# Altium PCB TSI_SAMP_SAMI_V3.4.PcbDoc (part 3 of 5)
Units mm, origin at the board's own origin, x right, y up, seen from the top; angles counter-clockwise.
Board outline 189 x 127.41 mm, 4 copper layers (Top Layer, GROUND, POWER, Bottom Layer), stack 1.56 mm thick; 227 components, 161 nets, 868 pads, 584 vias.
Unrouted connection lines stored in the file: 18.
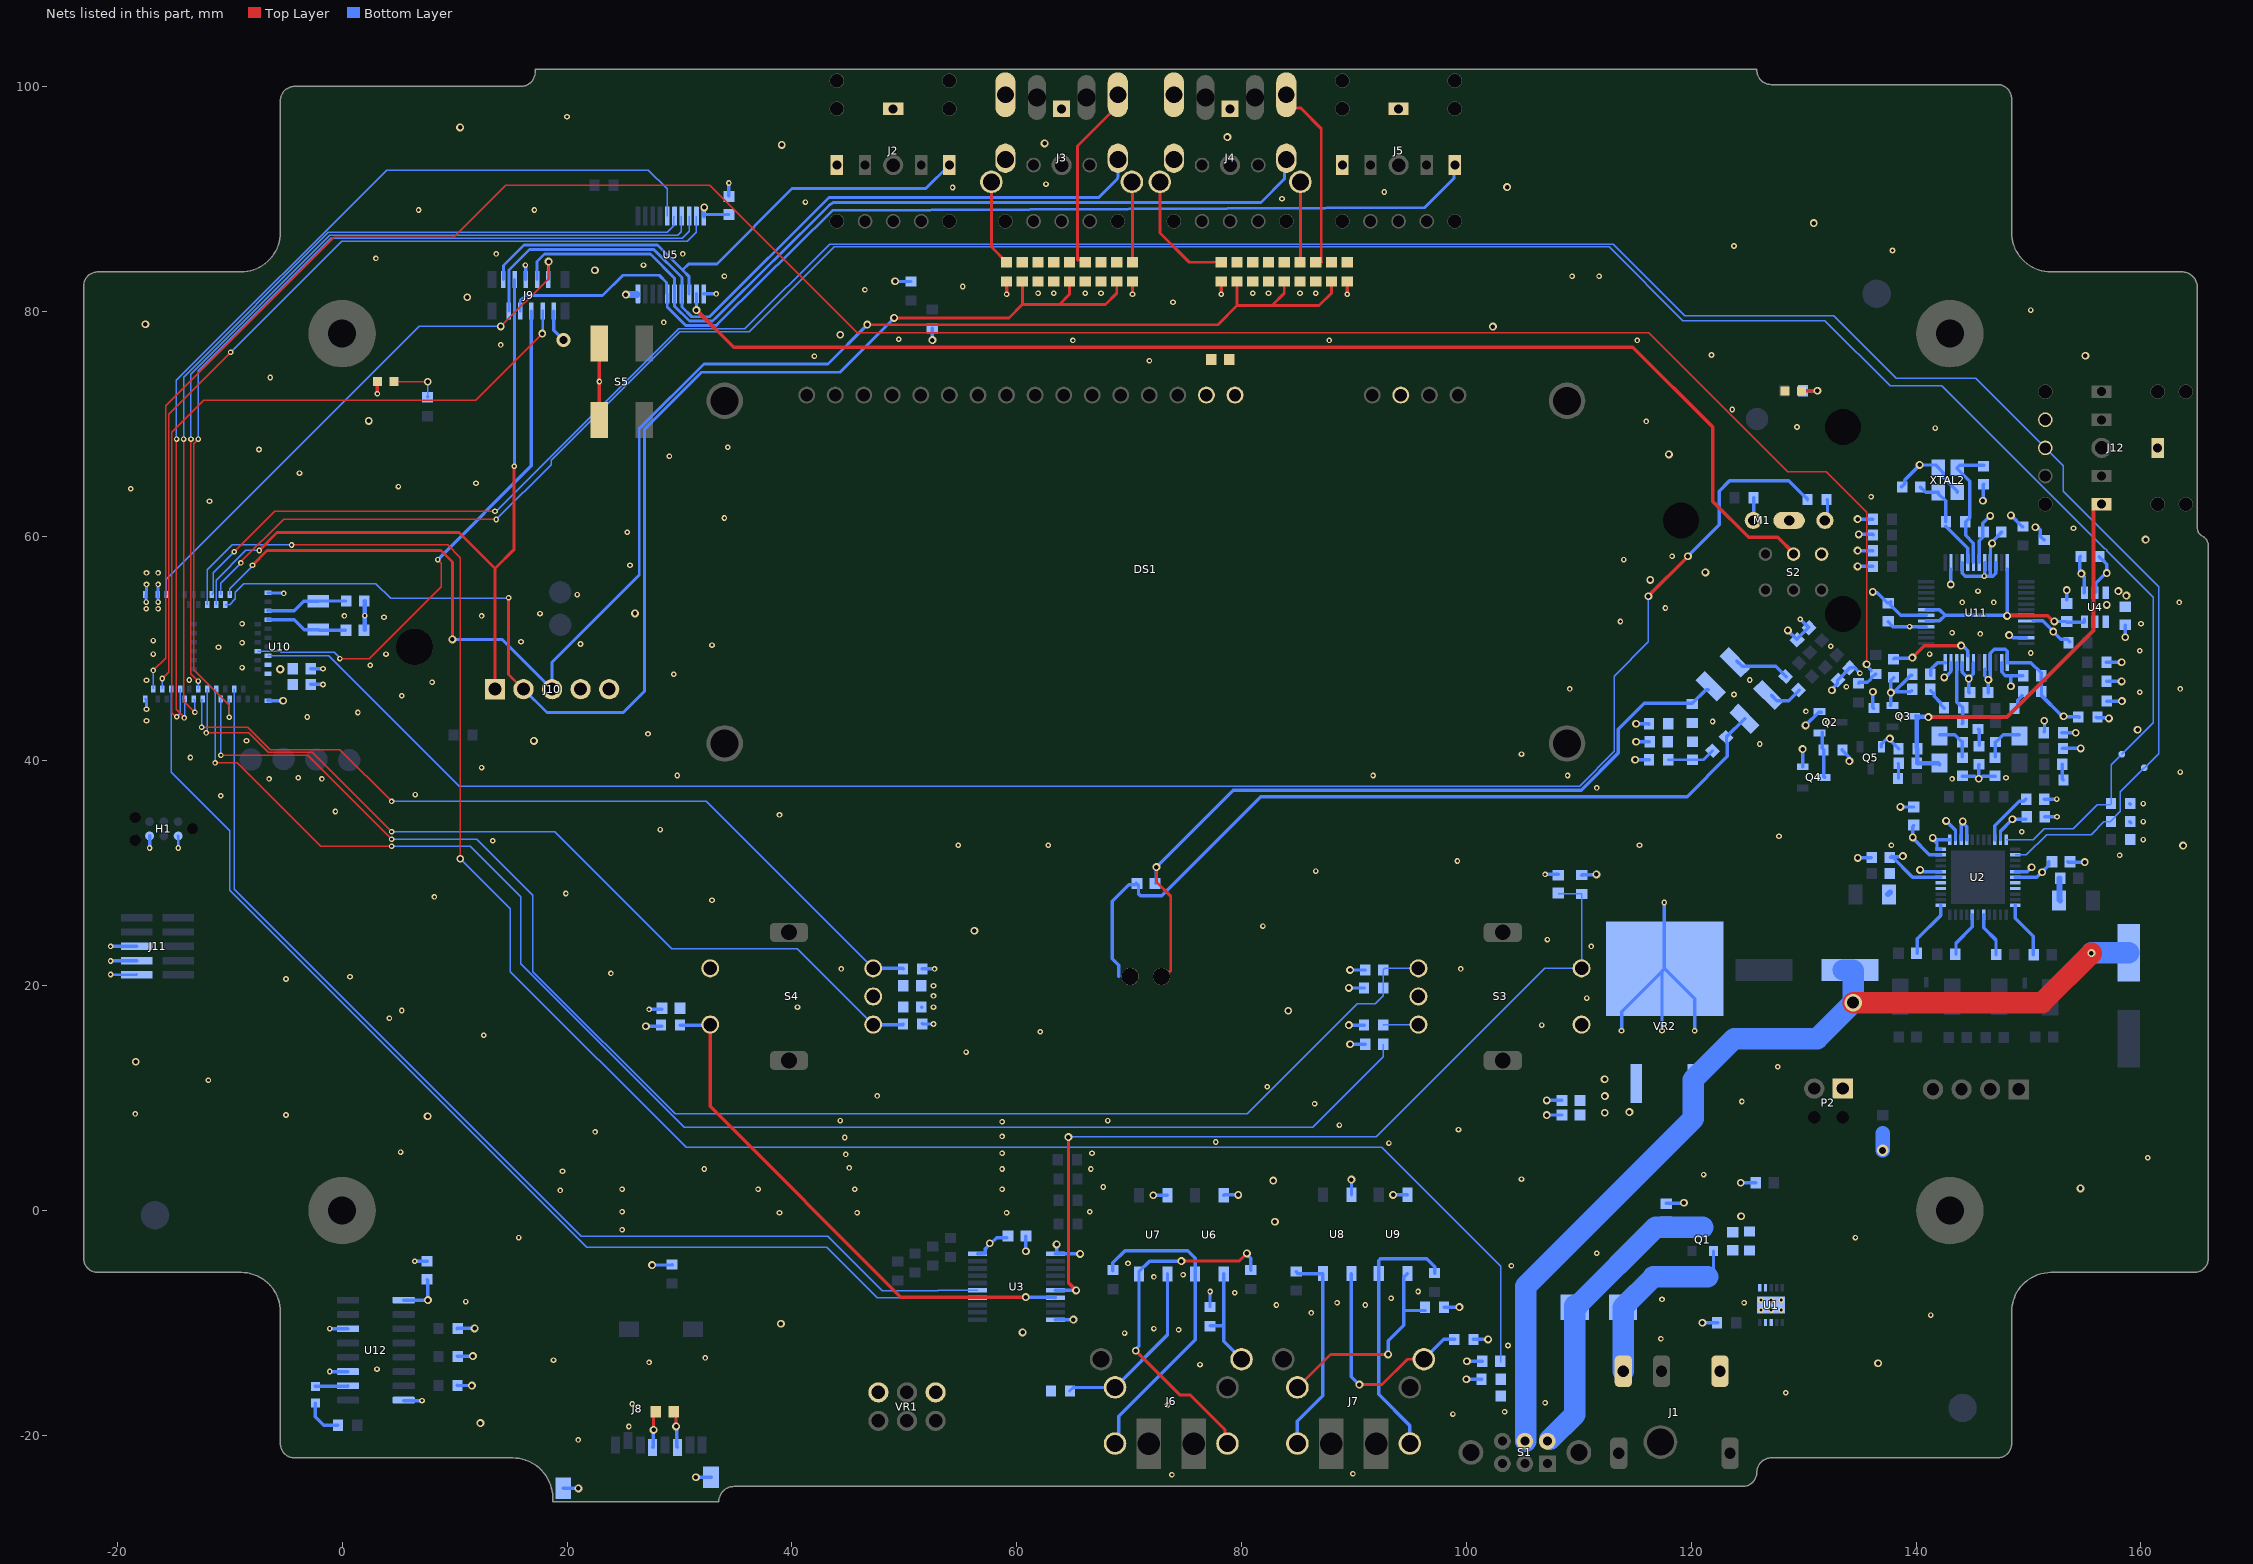
[diagram p4: the nets of this part, all layers, seen from the top]

## Part data (continued)
R8 R11 R26 R28 R30 R32 R34 R36 R37 R43 R48 R49 R50 R59 R60 R61 R64 R66: library part RES_10K_0603, "Res Thick Film 0603 10K Ohm 5% 1/10W 200ppm/C Molded SMD SMD Paper T/R", Case Code (Imperial)=0603, Case Code (Metric)=1608, Manufacturer="Vishay Dale", Manufacturer Part Number=CRCW060310K0JNEA, Max Operating Temperature=155°C, Max Power Dissipation=100mW, Min Operating Temperature=-55°C, Package Quantity=1, Resistance=10kR, Resistance Tolerance=5%, Resistor Type="Thick Film", Supplier Part Number 1=RMCF0603FT10K0CT-ND, Temperature Coefficient=200ppm/°C, Voltage Rating=75V, Case/Package=0603, Category="Chip SMD Resistors", ComponentLink1Description=https://datasheet.ciiva.com/3256/dcrcwe3-3256943.pdf?src-supplier=Avnet, ComponentLink1URL=https://datasheet.ciiva.com/3256/dcrcwe3-3256943.pdf?src-supplier=Avnet, ComponentLink2Description=https://datasheet.ciiva.com/2461/dcrcwe3-2461971.pdf?src-supplier=Digi-Key, ComponentLink2URL=https://datasheet.ciiva.com/2461/dcrcwe3-2461971.pdf?src-supplier=Digi-Key, ComponentLink3Description=https://datasheet.ciiva.com/2461/dcrcwe3-2461972.pdf?src-supplier=Digi-Key, ComponentLink3URL=https://datasheet.ciiva.com/2461/dcrcwe3-2461972.pdf?src-supplier=Digi-Key, ComponentLink4Description=https://datasheet.ciiva.com/2461/dcrcwe3-2461973.pdf?src-supplier=Digi-Key, ComponentLink4URL=https://datasheet.ciiva.com/2461/dcrcwe3-2461973.pdf?src-supplier=Digi-Key, ComponentLink5Description=https://datasheet.ciiva.com/3256/dcrcwe3-3256942.pdf?src-supplier=Avnet, ComponentLink5URL=https://datasheet.ciiva.com/3256/dcrcwe3-3256942.pdf?src-supplier=Avnet, ComponentLink6Description=https://datasheet.ciiva.com/16343/dcrcwe3-16343525.pdf?src-supplier=Future+Electronics, ComponentLink6URL=https://datasheet.ciiva.com/16343/dcrcwe3-16343525.pdf?src-supplier=Future+Electronics, ComponentLink7Description=https://datasheet.ciiva.com/16755/70201119-16755717.pdf?src-supplier=Allied+Electronics, ComponentLink7URL=https://datasheet.ciiva.com/16755/70201119-16755717.pdf?src-supplier=Allied+Electronics, ComponentLink8Description=https://datasheet.ciiva.com/16515/dcrcwe3-16515020.pdf?src-supplier=Avnet+Asia, ComponentLink8URL=https://datasheet.ciiva.com/16515/dcrcwe3-16515020.pdf?src-supplier=Avnet+Asia, ComponentLink9Description=https://datasheet.ciiva.com/16771/70201119-16771051.pdf?src-supplier=Allied+Electronics, ComponentLink9URL=https://datasheet.ciiva.com/16771/70201119-16771051.pdf?src-supplier=Allied+Electronics, Construction=Rectangular, Contact Plating=Tin, Depth=0.85mm, Features="Automotive AEC-Q200", Height=0.02inch, Lead Free="Lead Free", Length=1.55mm, Military Standard=Not, Mount="Surface Mount", Number of Pins=2, Number of Terminations=2, Packaging="Tape and Reel", Power Rating=100mW, Pricing 1="1=0.10000, 10=0.03200, 100=0.01310, 1000=0.00588, 2500=0.00510 (USD)", Radiation Hardening=No, REACH SVHC=Unknown, RoHS=Yes, RoHS Compliant=Yes, Series=CRCW, Size Code=0603, Stock 1=2, Supplier 1=Digi-Key, Termination=SMD/SMT, Tolerance=5%, Voltage Rating (DC)=75V, Weight=7.1E-05oz, Width=0.033inch
R12 R13: library part RES_22R_0603, "RES 22 OHM 1% 1/10W 0603", Supplier Part Number 1=A129668CT-ND, Supplier 1=Digi-Key
R14 R15 R44 R45 R46 R47 R58 R71 R73: library part RES_1K_0603, "1 kOhms ±1% 0.25W, 1/4W Chip Resistor 0603 (1608 Metric) Pulse Withstanding Thick Film", Supplier Part Number 1=541-3949-1-ND, Supplier 1=Digi-Key
R16 R17 R18 R19 R27 R29 R31 R33 R35 R65 R67 R68 R69 R70 R72 R74 R75 R76 R77 R78 R79 R80 R81 R82 R83 R84 R85 R86 R87 R88 R89 R90 R91 R92: library part RES_0R_0603, "RES SMD 0 OHM JUMPER 1/10W 0603", Supplier Part Number 1=A106051CT-ND, Supplier 1=Digi-Key
R20 R21: library part RES_4K7_0603, "RES 4.7K OHM 1% 1/4W 0603", Supplier Part Number 1=A130424CT-ND, Supplier 1=Digi-Key
R22 R23 R24 R25: library part RES_190R_0603, "RES 191 OHM 1% 1/10W 0603", Supplier Part Number 1=311-191HRCT-ND, Supplier 1=Digi-Key
R38: library part RES_1M_0603, "RES 1M OHM 1% 1/4W 0603", Supplier Part Number 1=A130452CT-ND, Supplier 1=Digi-Key
R51 R56: library part RES_100R_0603, "100 Ohms ±1% 0.25W, 1/4W Chip Resistor 0603 (1608 Metric) Pulse Withstanding Thick Film", Supplier Part Number 1=541-3244-1-ND, Supplier 1=Digi-Key
R57: library part RES_10R_0603, "10 Ohms ±1% 0.1W, 1/10W Chip Resistor 0603 (1608 Metric) Automotive AEC-Q200 Thick Film", Supplier Part Number 1=RMCF0603FT10R0CT-ND, Supplier 1=Digi-Key
R62 R63: library part "470 Resistor", "RES 470 OHM 1% 1/4W 0603", Manufacturer 1="TE Connectivity Passive Product", Manufacturer Part Number 1=CRGP0603F470R, Supplier Part Number 1=A130412CT-ND, Supplier 1=DigiKey
S1: library part SW_SLIDE_RA_TH_DPDT, "Slide Switch DPDT Through Hole, Right Angle", Supplier Part Number 1=612-EG2211, Supplier 1=Mouser
S2: library part SW_SLIDE_SPDT_VERT_TH, "SWITCH SLIDE SPDT 300MA 30V", Supplier Part Number 1=EG1919-ND, Supplier 1=Digi-Key
S3 S4: library part ENC_ROTARY_20PPR_TH, "Rotary Encoder Mechanical 20 Quadrature (Incremental) Vertical", Supplier Part Number 1=PEC11L-4115F-S0020-ND, Supplier 1=Digi-Key
S5: library part SW_TACTILE_SPST-NO, "Switch, SPNO SMD", Actuator Color=White, Case/Package=SMD/SMT, Contact Current Rating=20mA, Contact Resistance=100mR, Manufacturer=Panasonic, Manufacturer Part Number=EVQ-Q2U03W, Max Operating Temperature=85°C, Max Voltage Rating (AC)=250V, Max Voltage Rating (DC)=15V, Min Operating Temperature=-40°C, Operating Force=2.6N, Package Quantity=1, Supplier Part Number 1=P12955SCT-ND, Actuator Length=1.3mm, Actuator Type=Standard, Body Depth=6mm, Category="Tactile Switches", Color=White, ComponentLink1Description=https://datasheet.ciiva.com/25603/0900766b810ad3e5-25603904.pdf?src-supplier=RSComponents, ComponentLink1URL=https://datasheet.ciiva.com/25603/0900766b810ad3e5-25603904.pdf?src-supplier=RSComponents, ComponentLink2Description=https://datasheet.ciiva.com/8165/atk0000ce28-8165166.pdf?src-supplier=Avnet, ComponentLink2URL=https://datasheet.ciiva.com/8165/atk0000ce28-8165166.pdf?src-supplier=Avnet, ComponentLink3Description=https://datasheet.ciiva.com/2899/atk0000ce28-2899560.pdf?src-supplier=Digi-Key, ComponentLink3URL=https://datasheet.ciiva.com/2899/atk0000ce28-2899560.pdf?src-supplier=Digi-Key, ComponentLink4Description=https://datasheet.ciiva.com/2899/atk0000ce28-2899561.pdf?src-supplier=Digi-Key, ComponentLink4URL=https://datasheet.ciiva.com/2899/atk0000ce28-2899561.pdf?src-supplier=Digi-Key, ComponentLink5Description=https://datasheet.ciiva.com/2899/atk0000ce28-2899562.pdf?src-supplier=Digi-Key, ComponentLink5URL=https://datasheet.ciiva.com/2899/atk0000ce28-2899562.pdf?src-supplier=Digi-Key, ComponentLink6Description=https://datasheet.ciiva.com/30263/8atk0000ce28-30263950.pdf?src-supplier=Onlinecomponents.com, ComponentLink6URL=https://datasheet.ciiva.com/30263/8atk0000ce28-30263950.pdf?src-supplier=Onlinecomponents.com, ComponentLink7Description=https://datasheet.ciiva.com/17022/70270561-17022925.pdf?src-supplier=Allied+Electronics, ComponentLink7URL=https://datasheet.ciiva.com/17022/70270561-17022925.pdf?src-supplier=Allied+Electronics, ComponentLink8Description=https://datasheet.ciiva.com/16438/atk0000ce28-16438077.pdf?src-supplier=Future+Electronics, ComponentLink8URL=https://datasheet.ciiva.com/16438/atk0000ce28-16438077.pdf?src-supplier=Future+Electronics, ComponentLink9Description=https://datasheet.ciiva.com/46401/28111-46401279.pdf?src-supplier=Element14, ComponentLink9URL=https://datasheet.ciiva.com/46401/28111-46401279.pdf?src-supplier=Element14, Contact Plating=Gold,Silver, Current Rating=20mA, Depth=6.6mm, Electrical Life=200000Cycles, Height=2.5mm, Illumination Type=Non-Illuminated,Illuminated, Lead Free="Lead Free", Length=6.5mm, Max Current Rating=20mA, Mechanical Life=200000Cycles, Mount="Surface Mount", Number of Poles=1, Orientation=Straight, Packaging="Tape and Reel", Pricing 1="1=0.28000, 10=0.27200, 25=0.25760, 100=0.23310, 250=0.21252, 500=0.19756, 1000=0.16853 (USD)", Radiation Hardening=No, REACH SVHC="No SVHC", RoHS=Yes, Series=EVQQ2, Size=1.8mm, Stock 1=35170, Supplier 1=Digi-Key, Switch Function=Off-Mom, Switch Travel=0.25mm, Termination=SMD/SMT, Thickness=1.8mm, Throw Configuration=SPST, Voltage Rating (DC)=15V, Width=6mm
T4 T7 T8 T10 T11 T12 T13: "Test Point"
TP1 TP2: library part "TEST POINT ROUND SMD 0.6mm", "TEST POINT ROUND SMD 0.6mm"
U1: library part LIPO-CHARGING_8.4V_10DFN, "IC BATT CHG LI-ION 2CELL 10DFN", Battery Pack Voltage=8.4V, Case/Package=DFN, Manufacturer=Microchip, Manufacturer Part Number=MCP73213-A6SI/MF, Max Charge Current=1.1A, Max Operating Temperature=85°C, Max Supply Voltage=13V, Min Operating Temperature=-40°C, Supplier Part Number 1=MCP73213-A6SI/MF-ND, Category="Battery Management", ComponentLink1Description=http://www.microchip.com/mymicrochip/filehandler.aspx?ddocname=en026002&src-supplier=Digi-Key, ComponentLink1URL=http://www.microchip.com/mymicrochip/filehandler.aspx?ddocname=en026002&src-supplier=Digi-Key, Fault Protection="Over Voltage", Number of Cells=2, Packaging=Rail/Tube, Pricing 1="1=1.88000 (USD)", RoHS=No, Stock 1=347, Supplier 1=DigiKey
U2: "Amplifier IC 2-Channel (Stereo) Class D 44-TQFN-EP (7x7)", Manufacturer="Maxim Integrated", Manufacturer Part Number=MAX9744ETH+T, Supplier Part Number 1=MAX9744ETH+TCT-ND, Temperature Range="-40°C ~ 85°C (TA)", Manufacturer Link=https://datasheets.maximintegrated.com/en/ds/MAX9744.pdf, RoHS=3, Supplier 1=Digi-Key, Supplier 2=Mouser, Supplier Part Number 2=700-MAX9744ETH+T
U3 U5: "Switch Interfacing Interface 20-SSOP", Package="SSOP-20 Maxim", Supplier Part Number 1=MAX6818EAP+TCT-ND, Availability=Unavailable, MF="Maxim Integrated", MP=MAX6818EAP+T, Price=None, SnapEDA_Link=https://www.snapeda.com/parts/MAX6818EAP+T/Maxim%20Integrated/view-part/584081/?ref=snap, Supplier 1=Digi-Key
U4: library part IC_REG_LINEAR_3V3_1V8_SMD, "Linear Voltage Regulator IC Positive Fixed 2 Output 150mA, 150mA SOT-26", Supplier Part Number 1=AP7312-1833W6-7DICT-ND, Supplier 1=Digi-Key
U6 U7 U8 U9: library part IC_SSR_NO_SMD, "Solid State SPST-NO (1 Form A) 6-SMD, Gull Wing", Supplier Part Number 1=264-TLP170AM(V4TPLECT-ND, Supplier 1=Digi-Key
U10: "MDBT50Q-1M NRF52840 BASED BLE MO", Case/Package=SMD/SMT, Current - Receiving=32.7mA, Current - Transmitting=11.1mA, Frequency=2.5GHz, Manufacturer=Raytac, Manufacturer Part Number=MDBT50Q-1MV2, Max Operating Temperature=85°C, Min Operating Temperature=-40°C, Supplier Part Number 1=485-4078, Category="RF Receivers, Transceivers", ComponentLink1Description=http://www.raytac.com/download/index.php?index_id=24&src-supplier=Digi-Key, ComponentLink1URL=http://www.raytac.com/download/index.php?index_id=24&src-supplier=Digi-Key, Data Rate=2Mbps, Interface=I2C,SPI,USB,ADC,GPIO,UART, Memory Size=256KB, Mount="Surface Mount", Pricing 1="1=10.10000 (USD)", RoHS=No, Sensitivity=-103dBm, Supplier 1=Mouser, Supplier 2=DigiKey, Supplier Part Number 2=1597-1678-ND
U11: "VS1053B MP3/WAV/OGG/MIDI Player & Recorder (CODEC) Chip", Package="LQFP-48 VLSI", Supplier Part Number 1=1528-2645-ND, Availability=Unavailable, Check_prices=https://www.snapeda.com/parts/VS1053B-L/VLSI/view-part/105440/?ref=eda, MF=VLSI, MP=VS1053B-L, Price=None, SnapEDA_Link=https://www.snapeda.com/parts/VS1053B-L/VLSI/view-part/105440/?ref=snap, Supplier 1=DigiKey, Supplier 2=Mouser, Supplier Part Number 2=485-1681
U12: library part IC_BUF_ESD_CD74HC4050MT, "Buffer, Non-Inverting 6 Element 1 Bit per Element Push-Pull Output 16-SOIC", Package="SOIC-16 Texas Instruments", Supplier Part Number 1=296-14529-1-ND, Availability="In Stock", Check_prices=https://www.snapeda.com/parts/CD74HC4050MT/Texas+Instruments/view-part/?ref=eda, MF="Texas Instruments", MP=CD74HC4050MT, Price=None, Purchase-URL=https://pricing.snapeda.com/search/part/CD74HC4050MT/?ref=eda, SnapEDA_Link=https://www.snapeda.com/parts/CD74HC4050MT/Texas+Instruments/view-part/?ref=snap, Supplier 1=Digi-Key
VR1: library part POT_1K_LOG_TH_RA, "1k Ohm 2 Gang Logarithmic Panel Mount Potentiometer None 1.0 Kierros Carbon 0.025W, 1/40W PC Pins, Board Locks", Supplier Part Number 1=PTD902-1015K-A102-ND, Supplier 1=Digi-Key
VR2: library part 3.3V_REG_D2PAK, "IC REG LINEAR 3.3V 1.5A D2PAK", Case/Package=D2PAK, Dropout Voltage=900mV, Manufacturer="ON Semiconductor", Manufacturer Part Number=NCP565D2T33R4G, Max Input Voltage=9V, Max Operating Temperature=125°C, Max Output Current=1.5A, Min Current Limit=1.6A, Min Input Voltage=2.5V, Min Operating Temperature=-40°C, Nominal Output Voltage=3.3V, Output Voltage Accuracy=3%, Package Quantity=800, Power Rating=1.506W, Supplier Part Number 1=863-NCP565D2T33R4G, Accuracy=3%, Category="Voltage Regulators - Linear", ComponentLink1Description=https://datasheet.ciiva.com/8231/ncp565-d-8231702.pdf?src-supplier=Avnet, ComponentLink1URL=https://datasheet.ciiva.com/8231/ncp565-d-8231702.pdf?src-supplier=Avnet, ComponentLink2Description=https://datasheet.ciiva.com/29569/ncp565-d-29569517.pdf?src-supplier=Digi-Key, ComponentLink2URL=https://datasheet.ciiva.com/29569/ncp565-d-29569517.pdf?src-supplier=Digi-Key, ComponentLink3Description=https://datasheet.ciiva.com/29569/ncp565-d-29569518.pdf?src-supplier=Digi-Key, ComponentLink3URL=https://datasheet.ciiva.com/29569/ncp565-d-29569518.pdf?src-supplier=Digi-Key, ComponentLink4Description=https://datasheet.ciiva.com/29569/ncp565-d-29569519.pdf?src-supplier=Digi-Key, ComponentLink4URL=https://datasheet.ciiva.com/29569/ncp565-d-29569519.pdf?src-supplier=Digi-Key, ComponentLink5Description=https://datasheet.ciiva.com/16209/ncp565-d-16209563.pdf?src-supplier=Future+Electronics, ComponentLink5URL=https://datasheet.ciiva.com/16209/ncp565-d-16209563.pdf?src-supplier=Future+Electronics, ComponentLink6Description=https://datasheet.ciiva.com/26178/ncp565-d-26178262.pdf?src-supplier=Avnet+Europe, ComponentLink6URL=https://datasheet.ciiva.com/26178/ncp565-d-26178262.pdf?src-supplier=Avnet+Europe, Contact Plating=Tin,Matte, Halogen Free="Halogen Free", Height=4.572mm, Lead Free="Lead Free", Length=10.24mm, Mount="Surface Mount", Number of Outputs=1, Number of Pins=3, Number of Regulators=1, Output Current=1.5A, Output Type=Fixed, Output Voltage=3.3V, Packaging="Tape and Reel", Polarity=Positive, Pricing 1="1=2.09000, 10=1.88000, 50=1.78000, 100=1.52000, 1000=1.25000, 10000=1.25000 (USD)", Radiation Hardening=No, REACH SVHC="No SVHC", Reference Voltage=900mV, RoHS=Yes, RoHS Compliant=Yes, Series=-, Stock 1=45, Supplier 1=Mouser, Width=9.347mm
XTAL1: library part "XTAL - 32.768kHz ECS-.327-12.5-34B-TR", "CRYSTAL 32.7680KHZ 12.5PF SMD", Frequency Stability=-, Frequency Tolerance=±20ppm, Load Capacitance=12.5pF, Manufacturer="ECS Inc.", Manufacturer Part Number=ECS-.327-12.5-34B-TR, Operating Mode=Fundamental, Operating Temperature="-40°C ~ 85°C", Package / Case="2-SMD, No Lead", Category="Crystals, Oscillators, Resonators", ComponentLink1Description=http://www.ecsxtal.com/store/pdf/ecx-31b.pdf, ComponentLink1URL=http://www.ecsxtal.com/store/pdf/ecx-31b.pdf, Height - Seated (Max)="0.035\" (0.90mm)", Mounting Type="Surface Mount", Packaging="Cut Tape (CT)", Part Status=Active, Pricing 1="1=0.54, 10=0.448, 50=0.4034, 100=0.3586, 500=0.34068, 1000=0.28688 (USD)", Ratings=-, RoHS="RoHS Compliant", Size / Dimension="0.126\" L x 0.059\" W (3.20mm x 1.50mm)", Stock 1=258451, Supplier 1=Digi-Key, Supplier Part Number 1=50-ECS-.327-12.5-34B-TRCT-ND, Type="kHz Crystal (Tuning Fork)"
XTAL2: library part XTAL_12.288MHz_SMD, "CRYSTAL 12.2880MHZ 10PF SMD", Supplier Part Number 1=535-10902-1-ND, Supplier 1=Digi-Key

## Free pads (board coordinates)
  round 6 hole 2.5 unplated: 0(0,0) 0(0,78) 0(143,0) 0(143,78)
  round 2.54 smd far side mask+0.635: 0(136.487,81.556) 0(144.132,-17.555) 2(-16.65,-0.41)

## Via types
v1: diameter 0.5, hole 0.25, Top Layer to Bottom Layer, tented both sides, 372 vias
v2: diameter 0.7, hole 0.4, Top Layer to Bottom Layer, tented both sides, 201 vias
v3: diameter 1.575, hole 1.067, Top Layer to Bottom Layer, tented both sides, 4 vias
v4: diameter 1.27, hole 0.711, Top Layer to Bottom Layer, tented both sides, 3 vias
v5: diameter 1.016, hole 0.635, Top Layer to Bottom Layer, tented both sides, 2 vias
v6: diameter 0.762, hole 0.381, Top Layer to Bottom Layer, tented both sides, 1 vias
v7: diameter 0.7/0.7 (per signal layer), hole 0.4, Top Layer to Bottom Layer, tented both sides, 1 vias

## Nets (pads, with @x,y where several pads share a name; then routed paths per layer and width w, separated by ;. In a path a pad name is that pad's centre, name@x,y a point inside that pad or via, vN(x,y) a via of type N, cw(c..) or ccw(c..) an arc to the next point about the centre after c; other vN are vias at no path point)
1V8: C39.2 U4.6 U11.5 U11.7 U11.24 U11.31 | length 21.8
  Top Layer w0.305: v2(148.1,52.9) 151.693,52.9 152.193,52.4 v2(152.3,52.4)
  Bottom Layer w0.305: U11.5@140.901,52.447 142.079,52.447 142.579,52.947 ; U11.7@140.901,53.447 142.079,53.447 142.579,52.947 ; v2(148.1,52.9) 148.053,52.947 142.579,52.947 ; U11.24@148.101,57.049 148.101,53.205 148.253,53.053 v2@148.144,52.944 ; v2@148.253,52.944 U11.31@149.204,52.944 ; v2(152.3,52.4) 153.332,52.4 153.4,52.332 154.938,52.332 U4.6@154.968,52.362 U4.6@154.968,52.612
3V3: C21.2 C23.2 C38.2 F1.1 R65.2 R74.2 U4.1 U11.6 U11.14 U11.19 U11.32 | length 21.7
  Bottom Layer w0.305: v2(136.141,55.038) 136.216,54.963 136.537,54.963 137.424,54.076 C23.2@137.511,54.076 ; C23.2@137.741,54.139 137.741,53.845 138.639,52.947 U11.6@140.901,52.947 ; v2(143.078,55.689) 143.099,55.71 U11.14@143.099,57.049 ; U11.19@145.601,57.647 145.601,59.574 145.936,59.91 145.936,61.135 v2(146.596,61.795) ; v2(148.437,61.833) v2(148.437,61.833) 149.451,60.821 R74.2@149.501,60.821 ; U11.32@150.399,52.447 151.253,52.447 152.882,50.818 153.432,50.818 R65.2@153.65,50.6 ; F1.1@152.962,42.5 v2(154.2,42.5) ; C38.2@154.623,58.188 154.566,58.13 154.566,56.8 154.968,56.398 U4.1@154.968,54.962
  other v2: 152.2,51.5 154.698,56.659
3V3_LDO: C15.2 C18.2 C24.2 C25.2 C27.2 C29.2 C31.2 C35.2 C40.2 C55.2 C63.2 C67.2 C68.2 C69.2 DS1.6 H1.1 J8.4 J9.10 J10.4 J11.1 R4.2 R8.1 R11.1 R20.1 R21.1 R26.1 R28.1 R30.1 R32.1 R34.1 R36.1 R43.1 R48.1 R49.1 R50.1 R78.2 R79.2 R80.2 R86.2 R87.2 R88.2 U2.6 U2.10 U2.13 U2.21 U2.28 U3.20 U4.3 U4.4 U4.5 U5.20 U10.28 U10.30 U12.1 VR1.3 VR2.3 | length 59.9
  Top Layer w0.254: v2(27.7,-19.5) 27.7,-18.1 C63.2@27.9,-17.9
  Top Layer w0.305: v1(70.3,81.5) R80.2@70.3,82.65 ; v1(89.4,81.5) R86.2@89.4,82.65
  Bottom Layer w0.254: v1(-20.6,21) -20.582,20.982 -18.313,20.982 J11.1@-18.295,21 ; H1.1@-14.59,33.324 -14.583,33.317 -14.583,32.257 v1(-14.575,32.25)
  Bottom Layer w0.305: U12.1@5.472,-7.966 7.632,-7.966 7.597,-7.931 7.597,-6.201 C18.2@7.561,-6.166 ; R43.1@10.223,-15.548 10.236,-15.561 v2(11.544,-15.561) ; R48.1@10.249,-12.97 10.236,-12.97 10.261,-12.945 v2(11.633,-12.945) ; R50.1@10.249,-10.494 10.236,-10.494 10.248,-10.481 v2(11.773,-10.481) ; J9.10@18.836,80.02 18.836,78.293 v4(19.685,77.445) ; v2(27.013,16.4) R36.1@28.437,16.4 ; v2(27.575,-4.847) 27.584,-4.838 29.341,-4.838 R49.1@29.349,-4.83 ; J8.4@27.625,-21.063 27.663,-21.026 27.663,-19.537 v2(27.7,-19.5) ; v2(32.203,89.232) 32.166,89.195 U5.20@32.166,88.46 32.224,88.402 32.224,88.603 C40.2@34.4,88.603 ; v2(49.19,82.664) 49.216,82.638 R20.1@50.575,82.638 ; R32.1@51.6,21.5 v1(52.7,21.5) ; R28.1@51.603,16.64 51.643,16.6 v1(52.6,16.6) ; v2(52.5,77.429) R21.1@52.5,78.467 ; U3.20@56.522,-3.848 57.162,-3.848 57.219,-3.79 57.219,-3.409 57.296,-3.333 57.296,-3.324 57.603,-3.017 v2(57.603,-2.91) ; v2@57.661,-2.967 58.221,-2.407 C55.2@59.128,-2.407 ; v2(89.548,16.5) R30.1@90.9,16.5 ; v2(89.548,19.8) R26.1@90.9,19.8 ; R34.1@110.25,29.813 110.296,29.859 111.523,29.859 v2(111.569,29.905) ; C31.2@137.692,31.404 137.81,31.404 137.874,31.467 138.76,31.467 v2(138.823,31.531) ; C31.2@137.81,31.522 137.87,31.463 139.681,29.651 U2.6@142.179,29.651 ; C29.2@139.8,34.25 139.7,34.15 139.7,33.139 141.186,31.653 142.176,31.653 U2.10@142.179,31.651 ; v2(142.659,34.657) 143.501,33.815 143.501,32.978 U2.13@143.504,32.976 ; U2.21@147.504,32.976 147.504,33.746 v2(148.564,34.807) C27.2@149.758,34.807 ; U2.28@148.829,29.651 150.723,29.651 151.186,30.114 151.76,30.688 151.772,30.688 C24.2@151.804,30.719 ; v2(151.2,30.1) 151.2,30.115 C24.2@151.804,30.719 ; R8.1@159.013,34.6 R8.1@159.102,34.511 ; R11.1@159.013,36.2 R11.1@159.064,36.149 ; C24.2@151.804,30.719 151.804,31.035 C24.2@151.804,30.719
  other v1: 160.2,33 160.2,34.6 160.2,36.2 61.9,81.6 63.3,81.6 81,81.6 82.4,81.6
  other v2: 7.632,-7.966 112.3,8.7 114.493,8.756 112.317,10.182 112.292,11.681 139.7,33.2 156.959,53.872 158.7,54.7 158,55.1
  other v6: -5.5,48.15
9V: C20.2 D3.1 J1.1 Q1.1 R1.1 U1.1 U1.2 | length 16.9
  Bottom Layer w0.254: 121.481,-5.901 121.979,-5.403 Q1.1@121.979,-3.6
  Bottom Layer w1.905: J1.1@113.955,-14.291 113.945,-14.281 113.945,-8.611 D3.1@113.935,-8.601 116.635,-5.901 121.481,-5.901
9V_IN: C13.2 C14.2 C16.2 C17.2 C19.1 C22.1 R2.1 S1.5 U2.4 U2.5 U2.29 U2.30 VR2.1 | length 87.7
  Top Layer w1.905: v3(134.4,18.5) 151.2,18.5 v2(155.6,22.9)
  Bottom Layer w0.508: C17.2@137.506,28.127 C17.2@137.693,28.314 ; C14.2@152.758,29.554 152.758,27.638 C16.2@152.816,27.581
  Bottom Layer w1.905: S1.5@105.283,-20.514 105.283,-15.98 105.283,-6.717 120.18,8.18 120.18,11.655 123.825,15.3 131.2,15.3 v3(134.4,18.5) 134.4,21.352 134.352,21.4 C22.1@133.525,21.4 ; v2(155.6,22.9) 155.625,22.925 C19.1@158.9,22.925
AGND: C10.1 C12.1 C36.1 C37.1 C47.1 C50.1 C51.1 C52.1 C53.1 C56.2 C57.2 C61.1 C62.1 C64.1 F2.2 J12.1 J12.4 Q2.2 Q3.2 Q4.2 Q5.2 R37.2 R44.2 R59.2 U11.37 U11.40 U11.41 U11.47 | length 46.8
  Bottom Layer w0.305: v2(115,40.1) R44.2@116.25,40.1 ; v2(115.1,41.7) C53.1@116.25,41.7 ; v2(128.6,51.6) 129.383,50.817 129.383,50.802 130.452,51.871 130.429,51.871 v1(129.7,52.6) ; v2(129.896,41.046) 129.833,41.046 129.911,41.125 Q4.2@129.911,39.482 ; v2(130.163,43.164) 131.323,44.324 Q2.2@131.548,44.324 ; v2(132.506,46.28) 132.506,46.387 133.011,46.892 C52.1@133.011,47.157 ; C52.1@133.079,47.225 134.122,48.269 134.531,48.269 v1(135,47.8) ; Q5.2@136.916,41.259 136.916,41.484 137.391,41.959 137.646,41.959 v2(137.666,41.979) 137.666,41.895 138.468,41.094 R59.2@138.468,41.081 ; Q3.2@137.712,44.926 137.756,44.971 v2(137.756,46.072) 137.756,47.139 C57.2@137.998,47.381 ; C36.1@139.599,46.25 139.497,46.147 138.061,46.147 139.285,47.371 139.285,47.395 139.507,47.617 C56.2@139.621,47.617 ; v2(142.507,47.43) 142.583,47.506 142.692,47.506 143.099,47.913 143.099,48.744 U11.47@143.101,48.747 ; C64.1@144.114,38.647 145.227,38.647 145.46,38.414 v2(145.567,38.414) ; C62.1@145.6,39.676 145.584,39.659 145.584,38.431 v2(145.567,38.414) ; U11.41@146.101,48.149 146.101,47.576 146.431,47.247 v2(146.431,47.215) ; C10.1@146.426,46.067 146.428,46.069 146.428,47.213 v2(146.431,47.215) ; C61.1@147.023,38.647 145.907,38.647 145.674,38.414 v2(145.567,38.414) ; R37.2@153.013,41.1 153.027,41.114 v2(154.648,41.114) ; F2.2@154.506,43.896 154.466,43.935 153.152,43.935 v2(153.112,43.974) 153.037,44.05 152.922,44.05 151.154,45.818 151.154,47.215 151.125,47.244 151.125,47.831 150.209,48.747 U11.37@148.101,48.747 148.101,49.767 147.923,49.946 146.969,49.946 146.601,49.578 146.601,48.607 146.609,48.599 146.609,47.5 146.431,47.322 v2(146.431,47.215)
  other v1: 143.2,38.4 148,38.5 130.2,44.4
AIN0: J9.3 J10.1 U10.11 | length 67.2
  Top Layer w0.254: v1(-7.376,58.716) -5.792,60.3 10.4,60.3 13.589,57.111 ; J10.1@13.589,46.377 13.589,57.111 ; v1(15.3,66.2) 15.3,58.823 13.589,57.111
  Bottom Layer w0.127: U10.11@-11.2,53.9 -11.2,56.075 -8.559,58.716 v1(-7.376,58.716)
  Bottom Layer w0.254: v1(15.3,66.2) 15.318,66.218 15.318,82.802 J9.3@15.336,82.82
AIN4: J10.2 R75.2 R76.2 R77.2 U10.13 | length 123.9
  Top Layer w0.254: v1(14.808,54.508) 14.808,47.697 J10.2@16.129,46.377 ; v2(49.1,79.404) 49.104,79.4 59.3,79.4 60.5,80.6 ; R76.2@60.5,82.65 60.5,80.6 ; R75.2@64.7,82.65 64.7,81.5 63.8,80.6 ; R77.2@68.9,82.7 68.9,81.6 67.9,80.6 63.8,80.6 ; 60.5,80.6 63.8,80.6
  Bottom Layer w0.127: U10.13@-10.4,53.9 -10,53.9 -9.5,54.4 -9.5,55 -8.746,55.754 3.005,55.754 4.302,54.458 14.757,54.458 v1(14.808,54.508)
  Bottom Layer w0.254: J10.2@16.129,46.377 18.206,44.3 25,44.3 26.9,46.2 26.9,69.5 31.974,74.574 44.274,74.574 49.1,79.4 v2(49.1,79.404)
AIN6: J10.3 R83.2 R84.2 R85.2 U10.14 | length 138.6
  Top Layer w0.254: v1(-7.976,57.404) -6.68,58.7 8.8,58.7 9.8,57.7 v2(9.8,50.8) ; v2(46.7,78.8) 77.9,78.8 79.6,80.5 ; R84.2@79.6,82.65 79.6,80.5 ; R85.2@83.792,82.7 83.792,81.592 82.7,80.5 ; R83.2@88,82.65 88,81.6 86.9,80.5 82.7,80.5 ; 79.6,80.5 82.7,80.5
  Bottom Layer w0.127: U10.14@-10,54.8 -10,55.3 -7.976,57.324 v1(-7.976,57.404)
  Bottom Layer w0.254: v2(9.8,50.8) 14.246,50.8 J10.3@18.669,46.377 18.669,48.769 26.425,56.525 26.425,69.564 32.17,75.309 43.209,75.309 v2(46.7,78.8)
AVDD: C10.2 C12.2 F1.2 R45.1 R60.2 R61.2 U11.38 U11.43 U11.45 | length 13.3
  Bottom Layer w0.305: v2(115.1,43.3) 116.2,43.3 R45.1@116.237,43.263 ; R60.2@133.426,40.979 133.426,40.929 133.998,40.357 133.998,40.064 v2(134.074,39.989) ; v2(136.156,46.148) 136.156,44.751 R61.2@136.245,44.662 ; U11.45@144.101,48.747 144.104,48.744 144.104,47.891 v2(144.678,47.317) ; C10.2@144.726,46.067 144.678,46.115 v2(144.678,47.317) ; U11.43@145.101,48.747 145.101,47.74 v2(144.678,47.317) ; U11.38@147.601,48.747 147.601,47.916 147.946,47.571 148.303,47.571 ; v2(148.425,46.644) 148.423,46.646 148.423,47.451 148.303,47.571 ; C12.2@149.492,47.571 148.303,47.571 ; F1.2@151.401,42.606 151.401,42.64 151.42,42.659 151.42,43.549 v7(151.401,43.568)
B2LED: J9.9 U10.3 | length 49.5
  Top Layer w0.127: v2(14.11,78.638) 18.356,82.884 v2(18.356,84.406)
  Bottom Layer w0.127: U10.3@-15.6,54.8 -15.625,54.825 -15.625,56.175 6.838,78.638 v2(14.11,78.638)
  Bottom Layer w0.254: J9.9@18.336,82.82 18.356,82.839 v2(18.356,84.406)
B3LED: J9.8 U10.49 | length 66.8
  Top Layer w0.127: v1(-14.713,43.925) -14.8,43.925 -15.167,44.292 -15.167,69.233 -12.3,72.1 11.9,72.1 v2(17.8,78)
  Bottom Layer w0.127: v1(-14.713,43.925) -14.4,44.238 U10.49@-14.4,46.4
  Bottom Layer w0.254: v2(17.8,78) 17.836,78.036 J9.8@17.836,80.02
B4LED: J9.6 U10.25 | length 47.4
  Top Layer w0.127: v1(-0.2,49.1) 2.425,49.1 8.825,55.5 8.825,57.575 v1(8.5,57.9)
  Bottom Layer w0.127: U10.25@-7.494,49.756 -5.487,49.756 -5.415,49.684 -0.71,49.684 -0.2,49.174 v1(-0.2,49.1)
  Bottom Layer w0.305: v1(8.5,57.9) 16.836,66.236 J9.6@16.836,80.02
BAT_SOC: C11.2 R2.2 R3.1 U10.9 | length 173.2
  Top Layer w0.127: v1(-4.5,59.204) 9.396,59.204 10.516,58.084 10.516,31.316 v2(10.5,31.3)
  Bottom Layer w0.127: U10.9@-12,53.9 -12,57 -9.796,59.204 v1(-4.5,59.204) ; v2(10.5,31.3) 12.591,29.209 14.973,26.827 14.973,21.244 30.594,5.623 92.478,5.623 103.05,-4.95 C11.2@103.05,-13.5
BOOTL+: C8.2 U2.1 | length 5.1
  Bottom Layer w0.305: C8.2@140.096,22.899 140.096,24.167 142.179,26.25 U2.1@142.179,27.151
BOOTL-: C7.2 U2.40 | length 4.1
  Bottom Layer w0.305: C7.2@143.55,22.798 143.55,23.775 145.006,25.231 145.006,26.324 U2.40@145.004,26.326
BOOTR+: C5.1 U2.33 | length 5.1
  Bottom Layer w0.305: U2.33@148.829,27.151 148.808,27.151 148.806,27.149 148.806,26.019 150.436,24.389 C5.1@150.436,22.76
BOOTR-: C6.1 U2.38 | length 4
  Bottom Layer w0.305: U2.38@146.004,26.326 146.004,25.176 147.108,24.071 C6.1@147.108,22.772
ENC1A: C26.2 R26.2 S3.3 U10.41 | length 135.4
  Top Layer w0.127: v1(-10.785,40.5) -3.073,40.5 v1(4.4,33.027)
  Bottom Layer w0.127: U10.41@-10.8,45.5 -10.8,40.515 v1(-10.785,40.5) ; v1(4.4,33.027) 11.973,33.027 16.967,28.033 16.967,21.239 29.607,8.6 80.5,8.6 90.3,18.4 91.9,18.4 92.6,19.1 C26.2@92.6,21.4 92.746,21.546 S3.3@95.738,21.546
ENC1B: C43.2 R30.2 S3.5 U10.42 | length 134.3
  Top Layer w0.127: v1(-11.3,39.825) -9.325,39.825 -1.9,32.4 v1(4.4,32.4)
  Bottom Layer w0.127: v1(-11.3,39.825) -11.3,46.3 U10.42@-11.2,46.4 ; v1(4.4,32.4) 4.412,32.413 11.413,32.413 15.9,27.925 15.9,21.947 30.434,7.413 86.313,7.413 92.6,13.7 C43.2@92.6,14.8 ; R30.2@92.6,16.5 92.646,16.546 94.346,16.546 S3.5@95.738,16.546
ENC1SW: C45.2 R34.2 S3.1 U3.6 | length 76.3
  Top Layer w0.305: v2(64.605,6.537) 64.605,-6.413 65.275,-7.084 v2(65.275,-7.1)
  Bottom Layer w0.127: v2(64.605,6.537) 64.63,6.562 91.986,6.562 106.97,21.546 S3.1@110.238,21.546 110.238,28.175 R34.2@110.244,28.181 ; C45.2@108.183,28.175 108.189,28.181 R34.2@110.244,28.181 ; R34.2@110.25,28.187 R34.2@110.244,28.181
  Bottom Layer w0.305: U3.6@63.442,-7.098 63.443,-7.099 v2(65.275,-7.1) v2(65.275,-7.1)
ENC1SW_DB: U3.15 U10.38 | length 98.7
  Bottom Layer w0.127: U10.38@-9.6,46.4 -9.6,28.6 21.264,-2.264 43.171,-2.264 48.022,-7.115 52.991,-7.115 53.008,-7.098 U3.15@56.522,-7.098
ENC2A: C34.2 R28.2 S4.3 U10.43 | length 76.7
  Top Layer w0.127: v1(-12.087,42.494) -8.294,42.494 -6.554,40.754 -2.654,40.754 v1(4.4,33.7)
  Bottom Layer w0.127: v1(-12.087,42.494) -12.087,42.595 -12.009,42.673 -12.009,46.39 U10.43@-12,46.4 ; v1(4.4,33.7) 18.9,33.7 29.3,23.3 40.484,23.3 S4.3@47.238,16.546
  Bottom Layer w0.305: S4.3@47.238,16.546 49.846,16.546 R28.2@49.9,16.6
ENC2B: C44.2 R32.2 S4.5 U10.44 | length 73.8
  Top Layer w0.127: v1(-12.5,43) -8.392,43 -6.4,41.008 -0.208,41.008 v1(4.4,36.4)
  Bottom Layer w0.127: v1(-12.5,43) -12.5,45.4 U10.44@-12.4,45.5 ; v1(4.4,36.4) 32.384,36.4 S4.5@47.238,21.546
  Bottom Layer w0.305: S4.5@47.238,21.546 49.854,21.546 R32.2@49.9,21.5
ENC2SW: C46.2 R36.2 S4.1 U3.7 | length 47.7
  Top Layer w0.305: S4.1@32.738,16.546 32.738,9.262 49.7,-7.7 v2(60.8,-7.7)
  Bottom Layer w0.305: R36.2@30.05,16.5 32.692,16.5 S4.1@32.738,16.546 ; v2(60.8,-7.7) 60.824,-7.724 63.418,-7.724 U3.7@63.442,-7.748
ENC2SW_DB: U3.14 U10.50 | length 101.6
  Bottom Layer w0.127: U10.50@-15.2,46.4 -15.2,39 -10,33.8 -10,28.5 21.743,-3.243 43.087,-3.243 47.591,-7.748 U3.14@56.522,-7.748
G_LED_DOME: R71.1 U10.26 | length 161.8
  Top Layer w0.305: v2(116.192,54.645) 116.192,54.668 119.7,58.176 v2(119.7,58.2)
  Bottom Layer w0.127: U10.26@-6.6,49.35 -1.175,49.35 10.429,37.746 110.061,37.746 113.157,40.842 113.157,47.546 116.192,50.581 v2(116.192,54.645)
  Bottom Layer w0.305: v2(119.7,58.2) 122.5,61 122.5,64 123.4,64.9 128.687,64.9 129.993,63.594 130.043,63.594 130.341,63.296 R71.1@130.341,63.246
GND: C9.1 C11.1 C15.1 C18.1 C20.1 C21.1 C23.1 C24.1 C25.1 C26.1 C27.1 C28.1 C29.1 C30.1 C31.1 C34.1 C35.1 C38.1 C39.1 C40.1 C41.1 C42.1 C43.1 C44.1 C45.1 C46.1 C48.1 C49.2 C55.1 C63.1 C67.1 C68.1 C69.1 D4.2 D5.2 DS1.3 DS1.5 F2.1 F3.2 H1.5 J1.2 J2.1 J2.3 J3.1 J3.1B J3.2B_3 J4.1 J4.1B J4.2B_3 J5.1 J5.3 J8.6 J8.9 J8.10 J9.5 J10.5 J11.3 J11.5 M1.2 P2.1 R1.2 R3.2 R7.2 R29.1 R31.1 R33.1 R35.1 R39.2 R40.2 R41.2 R42.2 R52.1 R53.1 R54.1 R55.1 R81.2 R82.2 R89.2 R90.2 R91.2 R92.2 S2.3 S3.2 S3.4 S4.2 S4.4 S5.2 U1.0 U1.8 U1.9 U2.7 U2.11 U2.12 U2.14 U2.15 U2.27 U3.1 U3.10 U4.2 U5.1 U5.10 U6.3 U7.3 U8.3 U9.3 U10.1 U10.2 U10.15 U10.33 U10.55 U11.4 U11.16 U11.20 U11.21 U11.22 U11.35 U12.8 U12.11 U12.14 VR1.1 VR2.TAB XTAL2.2 XTAL2.4 | length 159.4
  Top Layer w0.254: C63.1@29.5,-17.9 29.7,-18.1 v2(29.7,-19.2)
  Top Layer w0.305: v1(3.131,72.66) D4.2@3.131,73.76 ; S5.2@22.877,70.541 S5.2@22.877,76.941 ; v1(59.1,81.5) R81.2@59.1,82.65 ; v1(78.2,81.5) R89.2@78.2,82.65
  Bottom Layer w0.254: U10.55@-17.5,45.5 -17.427,45.427 -17.427,45.205 -17.4,45.178 v1(-17.4,44.6) ; v1(-17.425,54.125) -17.462,54.162 -17.462,54.763 -17.427,54.798 -17.427,55.095 -17.4,55.122 v1(-17.4,55.7) ; v1(-16.375,54.125) -16.387,54.137 -16.387,54.788 U10.2@-16.4,54.8 -16.387,54.812 -16.387,55.688 v1(-16.375,55.7) ; U10.15@-6.6,54.95 -6.575,54.925 -5.225,54.925 v1(-5.2,54.9) ; R33.1@77.194,-8.587 77.2,-8.581 v1(77.2,-7.2) ; U11.21@146.601,57.647 146.601,59.063 146.761,59.223 v2(146.761,59.344)
  Bottom Layer w0.305: v1(-20.6,22.2) -20.583,22.217 -18.292,22.217 J11.3@-18.275,22.234 ; v1(-20.6,23.5) -20.598,23.502 -18.277,23.502 J11.5@-18.275,23.504 ; H1.5@-17.13,33.324 -17.127,33.322 -17.127,32.252 v1(-17.125,32.25) ; U10.33@-6.6,45.35 v2(-5.248,45.35) ; C67.1@-2.8,46.8 v1(-1.7,46.8) ; C68.1@-2.8,48.2 v1(-1.7,48.2) ; v1@-1.094,-14.316 U12.11@0.522,-14.316 ; v1@-1.094,-10.506 U12.14@0.522,-10.506 ; C42.1@1.995,51.631 C42.1@2.001,51.637 ; C41.1@2.001,54.215 C41.1@2.008,54.222 ; U12.8@5.472,-16.9 v1(7.1,-16.9) ; v1(6.456,-4.499) C18.1@7.556,-4.499 ; v1(16.3,84.1) 16.318,84.082 16.318,82.838 J9.5@16.336,82.82 ; J8.10@19.665,-24.713 v2(21.017,-24.713) ; v1(27.3,17.9) C46.1@28.45,17.9 ; v2(29.7,-19.2) 29.763,-19.263 29.763,-21.001 J8.6@29.825,-21.063 ; v2(31.463,-23.713) J8.9@32.815,-23.713 ; U5.1@32.166,81.54 v1(33.266,81.54) ; C40.1@34.4,90.25 v1(34.4,91.4) ; v2(60.82,-3.616) C55.1@60.82,-2.264 ; U3.10@63.442,-9.698 63.444,-9.696 65.034,-9.696 v2(65.036,-9.694) ; v2(63.55,-3) 63.55,-3.79 63.492,-3.848 U3.1@63.442,-3.848 v2(65.644,-3.848) ; v2(72.144,1.365) U7.3@73.414,1.365 ; U6.3@78.414,1.365 78.45,1.4 v2(79.7,1.4) ; v2(89.648,14.8) C43.1@91,14.8 ; v2(89.648,21.4) C26.1@91,21.4 ; U8.3@89.776,1.399 v2(89.776,2.752) ; v2(93.476,1.399) U9.3@94.746,1.399 ; R31.1@98.017,-8.587 v2(99.37,-8.587) ; v2(99.998,-15) R3.2@101.35,-15 ; v2(100.048,-13.4) C11.1@101.4,-13.4 ; R35.1@100.621,-11.459 v2(101.923,-11.459) ; v1(107,29.9) 108.17,29.9 C45.1@108.178,29.891 ; v2(107.148,8.5) C15.1@108.5,8.5 ; v2(107.148,9.8) C25.1@108.5,9.8 ; v1(113.8,16) 113.8,17.673 VR2.TAB@117.64,21.513 ; v1(117.4,16) 117.4,21.273 VR2.TAB@117.64,21.513 ; v1(117.6,27.4) 117.6,21.553 VR2.TAB@117.64,21.513 ; C9.1@117.779,0.65 119.3,0.65 v2(119.35,0.7) ; v1(120.3,16) 120.3,18.853 VR2.TAB@117.64,21.513 ; v2(120.998,-9.975) R7.2@122.35,-9.975 ; v2(124.398,2.475) C30.1@125.75,2.475 ; v2(134.798,57.3) R39.2@136.15,57.3 ; v2(134.798,58.7) R40.2@136.15,58.7 ; v2(134.798,61.5) R42.2@136.15,61.5 ; v2(134.81,31.378) 134.823,31.391 135.98,31.391 C31.1@135.992,31.404 ; v2(134.898,60.151) 136.149,60.151 R41.2@136.2,60.1 ; C23.1@137.511,52.376 137.939,51.947 U11.4@140.901,51.947 ; v2(138.6,35.9) C29.1@139.812,35.9 ; C48.1@138.675,64.363 138.973,64.661 138.973,64.983 v2(140.31,66.319) 141.745,66.319 142.418,65.646 142.418,65.24 143.675,63.983 XTAL2.4@143.675,63.881 ; v2(140.347,30.306) 140.454,30.306 140.609,30.151 U2.7@142.179,30.151 ; U2.11@142.179,32.151 141.858,32.151 141.856,32.153 141.856,32.671 141.478,33.049 v2(141.478,33.156) 141.585,33.156 141.765,32.976 U2.12@143.004,32.976 ; U2.14@144.004,32.976 144.004,34.356 v2@144.15,34.503 ; U11.16@144.101,57.647 144.104,57.644 144.104,56.699 144.367,56.435 v1(146.058,56.435) ; v2(144.15,34.61) v2@144.15,34.503 ; U2.15@144.504,32.976 144.504,34.15 v2@144.15,34.503 ; v2(145.948,63.144) 145.976,63.172 145.976,64.575 C49.2@146.004,64.602 ; U11.20@146.101,57.647 146.101,56.479 v1(146.058,56.435) ; U11.21@146.601,57.647 146.601,56.465 146.572,56.435 ; v2(146.761,59.344) 146.761,59.484 C21.1@147.636,60.36 ; U11.22@147.101,57.647 U11.22@147.101,57.647 147.099,56.701 146.833,56.435 146.572,56.435 ; v2(148.272,51.19) 148.374,51.19 148.617,50.947 U11.35@149.801,50.947 ; U2.27@148.829,30.151 149.902,30.151 150.279,30.527 v2(150.279,30.54) ; v2(150.609,60.779) 150.812,60.779 151.045,60.546 151.045,59.965 151.343,59.667 R55.1@151.393,59.667 ; C28.1@151.409,36.598 v1(152.509,36.598) ; C27.1@151.433,35.023 v1(152.533,35.023) ; C39.1@153.4,54.35 v2(153.4,55.2) ; C24.1@153.504,31.035 153.539,31 v2(155,31) ; U4.2@155.918,54.962 155.963,55.007 155.963,55.791 156.872,56.7 v2(156.959,56.7) 156.959,57.503 156.622,57.84 156.596,57.84 156.299,58.137 C38.1@156.299,58.163 ; F2.1@156.03,43.896 156.091,43.834 157.088,43.834 v2(157.15,43.773) ; R54.1@156.925,48.777 v2(158.278,48.777) ; R52.1@156.933,47.075 v2(158.285,47.075) ; R53.1@156.958,45.323 v2(158.31,45.323) ; v2(158.6,51) C35.1@158.6,52.05 ; v1(146.058,56.435) 146.572,56.435
  Bottom Layer w0.381: C42.1@2.001,51.637 1.998,51.64 1.998,52.921 2.005,52.928 2.005,54.212 C41.1@2.001,54.215
  Bottom Layer w0.635: v2(25.235,81.483) 25.247,81.496 U5.10@26.209,81.496
  Bottom Layer w1.27: v5(137.02,5.356) 137.024,5.36 F3.2@137.024,6.867
  other v1: 73.8,-23.5 89.9,-23.4 21,-20.4 25.5,-19.2 98.8,-18.1 103.4,-17.9 73.4,-17.3 25.8,-17.2 107,-17.1 128.4,-16.2 -1.1,-14.31 3.1,-14.1 76.3,-13.7 27.3,-13.5 18.8,-13.3 32.3,-13.1 103.7,-12 117.3,-11.4 69.6,-10.9 74.4,-10.6 -1.1,-10.5 72.2,-10.5 141.3,-9.3 86.2,-9.1 126.2,-8.85 127.1,-8.85 128,-8.85 83.1,-8.4 91,-8.4 88.5,-8.2 124.7,-8.2 11,-8.1 126.2,-7.95 127.1,-7.95 128,-7.95 117.4,-7.9 93.3,-7.8 79.4,-7.3 95.7,-7.2 72.2,-5.9 74.8,-5.7 104,-4.9 69.9,-4.7 111.6,-3.8 15.7,-2.4 134.6,-2.4 24.9,-1.7 38.9,-0.2 45.8,-0.2 59.1,-0.2 24.9,-0.1 66.5,-0.1 19.4,1.8 24.9,1.9 37,1.9 45.6,1.9 58.7,1.9 67.7,2.1 104.9,2.8 121.1,3.2 19.6,3.5 32.2,3.7 58.7,3.7 66.6,3.7 45.1,3.8 160.6,4.7 44.8,5 58.7,5.1 66.7,5.1 5.2,5.2 93.101,6.002 77.7,6.1 44.7,6.5 58.7,6.6 22.5,7 99.3,7.2 88.7,7.6 58.7,7.9 44.3,8 68.1,8 -5,8.5 -18.4,8.6 86.5,9.5 124.5,9.7 47.6,10.2 82.289,11.011 -11.9,11.6 127.7,12.8 55.5,14.1 12.6,15.6 62.1,15.9 106.7,16.5 4.2,17.1 5.3,17.8 40.5,18.1 52.6,18.1 110.7,18.9 52.6,19.1 52.6,20 -5,20.6 0.7,20.8 23.9,21.1 44.4,21.5 99.5,21.5 111.1,23.5 107.2,24.1 81.9,25.3 32.9,27.6 8.2,27.9 19.9,28.2 86.6,30.2 99.2,31.1 158.1,31.6 54.8,32.5 62.8,32.5 115.4,32.5 137.8,32.5 13.4,32.9 127.8,33.3 149.4,33.7 28.3,33.887 38.9,35.2 -0.6,35.5 -10.8,36.9 6.5,37 111.6,37.6 -6.5,38.4 -1.8,38.4 -3.9,38.5 29.8,38.7 91.7,38.7 109,38.7 163.5,39 12.4,39.4 -13.5,40.3 104.9,40.6 126.1,41.5 -8.511,41.789 27.2,42.4 132.135,43.434 121.9,43.5 -17.4,43.575 -3.1,43.9 138.612,43.977 1.4,44.3 5.3,45.8 123.8,45.9 159.9,46.1 109.2,46.4 163.5,46.4 133.8,46.6 8,47 -17.4,47.175 -13.6,47.2 125.2,47.2 29.5,47.7 -8.9,48.3 2.5,48.5 -16.8,49.5 3.9,49.5 141.2,49.5 150.2,49.6 159.9,49.8 -11,50.1 132.4,50.2 32.9,50.3 21.2,50.4 -8.9,50.5 15.904,50.6 -16.8,50.7 145.7,51.3 143.2,51.4 139.42,51.947 -8.9,52.2 160,52.2 113.7,52.4 3.72,52.78 0.2,52.9 12.4,52.9 2.001,52.925 17.6,53.1 -17.425,53.525 -16.375,53.525 117.7,53.6 144.1,54.1 146.9,54.1 163.4,54.1 20.911,54.789 145.5,55.1 -17.4,56.725 -16.375,56.725 25.6,57.4 114,57.9 118.3,58.2 25.361,60.339 154,60.7 34,61.6 -11.8,63.1 136,63.5 -18.8,64.2 5,64.4 11.9,64.7 -3.8,65.6 29.104,67.1 -7.4,67.7 34.3,67.9 141.7,69.6 129.4,69.7 116,70.2 123.654,71.254 22.877,73.741 -6.4,74.1 71.8,75.6 42,76 121.8,76.1 14.1,77 65,77.4 87.8,77.4 115.2,77.4 49.5,77.5 28.6,79 150.2,80.1 73.9,80.8 66.1,81.6 67.5,81.6 85.2,81.6 86.6,81.6 46.5,81.9 55.2,82.2 34,83.1 109.4,83.1 111.8,83.1 26.8,84.1 3,84.7 13.7,85.1 30.3,85.1 137.9,85.4 123.8,85.8 6.8,89 17.1,89 41.2,89.7 83.6,90 92.7,90.6 54.3,91 62.6,91.3 20,97.3
  other v2: 12.293,-18.901 136.614,-13.58 60.528,-10.837 39.027,-10.062 82.969,-0.994 124.429,-0.5 154.622,1.978 82.816,2.669 7.594,8.391 -18.364,13.243 84.15,17.776 56.235,24.888 163.741,32.47 17.056,41.779 159.704,42.768 26.047,53.121 116.357,56.092 121.26,56.769 160.418,59.679 118.014,67.264 2.362,70.24 155.067,76.031 44.3,77.9 102.362,78.622 -17.501,78.838 11.125,81.242 22.479,83.642 130.899,87.83 103.619,91.043 39.103,94.789 62.484,94.916 78.74,95.488 10.49,96.351
JB1: J2.2 J9.1 U5.3 | length 48.8
  Bottom Layer w0.254: J9.1@14.336,82.82 14.336,84.059 16.172,85.895 28.037,85.895 30.282,83.65 ; U5.3@30.866,81.54 30.866,83.065 30.282,83.65 ; J2.2@54.009,93.002 51.907,90.9 40.026,90.9 33.327,84.201 30.832,84.201 30.282,83.65
JB1_DB: U5.18 U10.39 | length 84.1
  Top Layer w0.127: v1(-12.8,68.625) -13.2,68.225 -13.2,48.123 -10.04,44.963 v1(-10.04,43.875)
  Bottom Layer w0.127: v1(-12.8,68.625) -12.8,74.7 -1.008,86.492 30.243,86.492 30.866,87.115 U5.18@30.866,88.46 ; v1(-10.04,43.875) -10.04,45.459 U10.39@-10,45.5
JB2: J3.5B_2 J9.2 U5.4 | length 68.9
  Bottom Layer w0.254: J9.2@14.836,80.02 14.836,83.665 16.66,85.489 27.719,85.489 30.216,82.992 U5.4@30.216,81.54 30.216,80.384 31.1,79.5 32.688,79.5 43.307,90.119 67.304,90.119 68.925,91.74 ccw(c68.678,91.919) 68.975,91.85 cw(c70.245,91.55) 68.996,91.928 ccw(c68.704,92.014) 69.009,92.014 69.009,92.989 J3.5B_2@68.995,93.002
JB2_DB: U5.17 U10.45 | length 78.6
  Top Layer w0.127: v1(-13.45,68.625) -13.454,68.621 -13.454,47.754 v1(-12.8,47.1)
  Bottom Layer w0.127: v1(-13.45,68.625) -13.45,74.409 -1.113,86.746 29.851,86.746 30.177,87.072 30.177,88.42 U5.17@30.216,88.46 ; U10.45@-12.8,46.4 v1(-12.8,47.1)
JB3: J4.5B_2 J9.7 U5.5 | length 78.7
  Bottom Layer w0.254: J9.7@17.336,82.82 17.336,84.411 18.007,85.082 27.418,85.082 29.566,82.934 U5.5@29.566,81.54 29.566,80.434 30.881,79.119 32.953,79.119 33.39,79.556 43.306,89.414 43.672,89.662 81.715,89.662 83.832,91.779 J4.5B_2@83.832,93.002
JB3_DB: U5.16 U10.46 | length 81.5
  Top Layer w0.127: v1(-14.1,68.625) -14.1,45.325 v1(-13.1,44.325)
  Bottom Layer w0.127: v1(-14.1,68.625) -14.1,74.118 -1.218,87 28.917,87 29.509,87.592 29.509,88.402 U5.16@29.566,88.46 ; U10.46@-13.2,45.5 -13.1,45.4 v1(-13.1,44.325)
JB4: J5.2 J9.4 U5.6 | length 94.5
  Bottom Layer w0.254: J9.4@15.836,80.02 15.836,80.936 16.294,81.394 23.165,81.394 24.971,83.2 28.2,83.2 28.858,82.542 28.858,81.598 U5.6@28.916,81.54 28.916,80.384 30.562,78.738 33.277,78.738 33.571,79.032 33.749,79.211 43.614,88.957 96.295,89.218 96.384,89.307 98.901,91.824 98.901,92.936 J5.2@98.967,93.002
JB4_DB: U5.15 U10.48 | length 86.6
  Top Layer w0.127: v1(-14.727,68.624) -14.749,68.602 -14.749,44.584 -14.05,43.885 v1(-14.05,43.825)
  Bottom Layer w0.127: v1(-14.727,68.624) -14.749,68.646 -14.749,73.851 3.954,92.554 27.246,92.554 28.916,90.884 U5.15@28.916,88.46 ; v1(-14.05,43.825) -14,43.875 U10.48@-14,45.5
LEFT: R12.1 R62.2 U11.46 | length 5.7
  Bottom Layer w0.305: U11.46@143.601,48.747 143.601,45.231 143.784,45.048 143.834,45.048 144.132,44.75 144.132,44.7 144.132,43.329 R62.2@144.119,43.316
LEFT_S: C33.2 C66.1 J12.2 Q3.3 R59.1 | length 37
  Top Layer w0.381: v2(141.1,43.9) 148.082,43.9 155.783,51.602 155.783,62.48 156.143,62.84 J12.2@156.493,62.84
  Bottom Layer w0.381: v2(141.1,43.9) 141.062,43.938 140.05,43.938 140.012,43.977 140.052,43.936 140.052,41.122 140.093,41.081 140.098,41.076 140.098,39.788 140.103,39.783 141.98,39.783 C33.2@142.087,39.676
MAX_MUTE: J12.5 R8.2 TP1.1 U2.24 U10.10 | length 233.5
  Top Layer w0.127: v1(-9.6,58.6) -6,62.2 v1(13.6,62.2)
  Bottom Layer w0.127: U10.10@-11.6,54.8 -11.463,54.937 -11.463,56.737 v1(-9.6,58.6) ; v1(13.6,62.2) 13.701,62.2 13.833,62.333 13.836,62.333 29.924,78.421 35.812,78.421 43.366,85.975 113.061,85.975 119.423,79.613 132.664,79.613 138.248,74.028 145.304,74.028 J12.5@151.493,67.84 153.1,66.233 153.1,64 161.6,55.5 161.6,40.656 TP1.1@160.322,39.378 ; U2.24@148.829,31.651 149.817,31.651 151.614,33.448 155.562,33.448 156.705,34.591 157.315,34.591 157.315,34.641 158.173,35.499 158.173,37.273 TP1.1@160.3,39.4
MAX_SHDN: R11.2 TP2.1 U2.22 U10.12 | length 228.8
  Top Layer w0.127: v1(-9.011,57.611) -9.011,57.704 -5.215,61.5 13.673,61.5 v1(13.7,61.473)
  Bottom Layer w0.127: U10.12@-10.8,54.8 -10.8,55.8 -9.011,57.589 v1(-9.011,57.611) ; v1(13.7,61.473) 18.584,66.357 18.584,66.721 30.03,78.167 36.206,78.167 43.76,85.721 112.69,85.721 119.255,79.156 131.889,79.156 137.69,73.355 142.289,73.355 156.766,58.878 156.827,58.878 156.939,58.767 156.939,58.705 161.1,54.544 161.1,43.4 TP2.1@158.3,40.6 ; U2.22@148.004,32.976 150.416,32.976 151.409,33.969 153.987,33.969 156.095,36.077 157.302,36.077 R11.2@157.302,36.127 ; R11.2@157.35,36.2 157.35,39.65 TP2.1@158.1,40.4
MODE_SW: S2.2 U5.2 | length 112
  Top Layer w0.305: v2(31.516,80.104) 34.82,76.8 114.8,76.8 121.9,69.7 121.9,63.072 125.095,59.877 127.711,59.877 129.095,58.493 S2.2@129.095,58.391
  Bottom Layer w0.305: v2(31.516,80.104) U5.2@31.516,81.54
MODE_SW_DB: U5.19 U10.52 | length 79.8
  Top Layer w0.127: v1(-16,47.325) -15.421,47.904 -15.421,70.854 v1(-9.925,76.35)
  Bottom Layer w0.127: U10.52@-16,46.4 v1(-16,47.325) ; v1(-9.925,76.35) -0.037,86.238 30.714,86.238 31.516,87.041 U5.19@31.516,88.46
MUTE: R64.2 R66.2 U10.54 | length 213.3
  Top Layer w0.127: v1(-16.8,48.05) -15.707,49.143 -15.707,71.593 -0.711,86.589 9.944,86.589 14.556,91.2 32.7,91.2 45.819,78.081 116.203,78.081 128.585,65.7 132,65.7 135.6,62.1 135.6,48.6 v2(135.594,48.594)
  Bottom Layer w0.127: U10.54@-16.8,46.4 v1(-16.8,48.05)
  Bottom Layer w0.254: v2(135.594,48.594) 135.594,48.474 136.01,48.058 R64.2@136.01,47.983
  Bottom Layer w0.305: R66.2@134.886,46.909 134.956,46.979 135.665,46.979 135.865,47.178 136.063,47.376 136.063,47.426 136.36,47.724 R64.2@136.41,47.724
NetC9_2: C9.2 D3.2 Q1.3 S1.6 | length 27.1
  Bottom Layer w1.905: S1.6@107.416,-20.362 109.626,-18.152 109.626,-8.46 109.682,-8.404 109.933,-8.404 116.851,-1.486 Q1.3@121.029,-1.486
NetC28_2: C28.2 U2.20 | length 5
  Bottom Layer w0.305: U2.20@147.004,32.976 147.004,34.224 149.187,36.407 149.568,36.407 149.664,36.503 C28.2@149.759,36.598
NetC32_1: C32.1 C61.2 R63.1 | length 3.8
  Bottom Layer w0.305: C61.2@147.023,40.347 147.023,41.66 147.066,41.703 147.116,41.703 147.744,42.332 C32.1@149.19,42.332
NetC33_1: C33.1 C64.2 R62.1 | length 3.6
  Bottom Layer w0.305: C33.1@142.087,42.326 143.434,42.326 144.069,41.691 144.119,41.691 144.114,41.686 C64.2@144.114,40.347
NetC36_2: C36.2 R12.2 | length 2
  Bottom Layer w0.305: C36.2@141.299,46.25 141.597,45.952 141.597,45.763 142.209,45.151 142.209,44.998 R12.2@142.506,44.7
NetC37_2: C37.2 R13.2 | length 1.6
  Bottom Layer w0.305: R13.2@148.729,44.548 149.026,44.845 149.026,45.39 C37.2@149.454,45.818
NetC41_2: C41.2 U10.17 XTAL1.2 | length 7.3
  Bottom Layer w0.305: U10.17@-6.6,53.35 -4.25,53.35 -3.411,54.189 XTAL1.2@-2.119,54.189 -2.086,54.222 C41.2@0.308,54.222
NetC42_2: C42.2 U10.18 XTAL1.1 | length 7.3
  Bottom Layer w0.305: U10.18@-6.6,52.55 -4.25,52.55 -3.369,51.669 -2.139,51.669 XTAL1.1@-2.119,51.689 -2.061,51.631 C42.2@0.295,51.631
NetC48_2: C48.2 R38.2 U11.17 XTAL2.1 | length 8.7
  Bottom Layer w0.305: C48.2@140.375,64.363 140.858,63.881 XTAL2.1@141.974,63.881 141.973,63.779 142.623,63.13 R38.2@142.623,61.278 ; R38.2@142.623,60.878 144.601,58.899 U11.17@144.601,57.647
NetC49_1: C49.1 R38.1 U11.18 XTAL2.3 | length 11.7
  Bottom Layer w0.305: U11.18@145.101,57.647 145.101,59.374 144.423,60.053 144.423,61.278 144.78,61.635 144.78,64.884 143.675,65.989 143.675,66.091 143.887,66.302 C49.1@146.004,66.302
NetC53_2: C53.2 C54.2 R45.2 R46.2
NetC54_1: C54.1 R44.1 R47.2 | length 4.3
  Bottom Layer w0.254: R44.1@117.95,40.1 121.1,40.1 R47.2@121.899,40.899
NetC56_1: C56.1 U11.48 | length 2.1
  Bottom Layer w0.305: C56.1@141.321,47.617 141.3,47.638 141.3,48.142 141.904,48.747 U11.48@142.601,48.747
NetC57_1: C57.1 U11.44 | length 7.7
  Top Layer w0.305: v2(139.667,49.189) 140.728,50.25 v2(144.005,50.25)
  Bottom Layer w0.305: C57.1@137.998,49.081 138.052,49.135 139.613,49.135 v2(139.667,49.189) ; v2(144.005,50.25) 144.081,50.175 144.222,50.175 144.599,49.798 U11.44@144.599,49.344
NetC58_1: C58.1 C60.2 MK1.1 R46.1 | length 69.1
  Top Layer w0.254: v2(72.428,30.553) 72.428,29.234 73.698,27.964 73.698,21.346 73.15,20.798 MK1.1@73.15,20.75
  Bottom Layer w0.305: C60.2@72.35,29.1 72.428,29.178 v2(72.428,30.553) 79.278,37.403 110.203,37.403 113.5,40.7 113.5,42.8 115.827,45.127 117.56,45.127 117.568,45.12 120.091,45.12 121.311,46.339 C58.1@121.513,46.339 ; MK1.1@72.888,20.824 MK1.1@72.888,21.018
NetC58_2: C58.2 R51.2 | length 5
  Bottom Layer w0.305: C58.2@124.059,48.885 124.518,48.425 127.523,48.425 R51.2@128.459,47.489
NetC59_1: C59.1 C60.1 MK1.2 R47.1 | length 72.3
  Bottom Layer w0.305: 69.075,20.825 69.075,21.837 68.516,22.396 68.516,27.517 69.968,28.969 70.519,28.969 70.65,29.1 70.831,28.919 70.831,28.191 71.01,28.013 72.885,28.013 81.699,36.826 119.626,36.826 123.201,40.401 123.201,41.58 123.136,41.645 123.136,42.136 C59.1@124.739,43.739
NetC59_2: C59.2 R56.2 | length 3
  Bottom Layer w0.305: C59.2@127.139,45.823 127.598,45.363 128.667,45.363 R56.2@129.599,46.295
NetC62_2: C62.2 R57.2 | length 1.5
  Bottom Layer w0.305: R57.2@145.542,42.834 145.6,42.775 C62.2@145.6,41.376
NetC65_2: C65.2 R9.1 | length 1.4
  Bottom Layer w0.305: C65.2@153,39.7 153,38.4 R9.1@153.1,38.3
NetC66_2: C66.2 R10.1 | length 1.4
  Bottom Layer w0.254: C66.2@138.403,39.783 138.43,39.756 R10.1@138.43,38.427
NetD4_1: D4.1 R14.1 | length 4.3
  Top Layer w0.127: D4.1@4.647,73.744 v2@7.597,73.744
  Top Layer w0.305: D4.1@4.631,73.76 D4.1@4.647,73.744 ; v2@7.597,73.744 v2(7.613,73.729)
  Bottom Layer w0.127: R14.1@7.606,72.406 v2@7.606,73.723
  Bottom Layer w0.305: R14.1@7.6,72.4 R14.1@7.606,72.406
NetD5_1: D5.1 R15.1 | length 2.6
  Top Layer w0.305: D5.1@129.82,72.92 v2(131.216,72.92)
  Bottom Layer w0.305: R15.1@129.995,72.92 v2(131.216,72.92)
NetD6_1: D6.1 U12.10 | length 2.9
  Bottom Layer w0.305: D6.1@-2.388,-15.636 -2.363,-15.611 0.497,-15.611 U12.10@0.522,-15.586
NetD6_2: D6.2 R58.1 | length 3.5
  Bottom Layer w0.305: D6.2@-2.388,-17.136 -2.388,-18.355 -1.651,-19.092 R58.1@-0.403,-19.092
NetJ3_1A: J3.1A R75.1 R78.1 R91.1 | length 17
  Top Layer w0.254: R91.1@66.1,84.35 65.904,84.546 65.4,84.546 65.4,94.705 68.995,98.3 J3.1A@68.995,99.3
NetJ3_2A: J3.2A R77.1 R80.1 R82.1 | length 7.2
  Top Layer w0.254: J3.2A@70.245,91.55 70.307,91.488 R80.1@70.307,84.35
NetJ3_5A: J3.5A R76.1 R79.1 R81.1 | length 7.8
  Top Layer w0.254: J3.5A@57.745,91.55 J3.5A@57.745,91.502 57.745,85.705 R81.1@59.1,84.35
NetJ4_1A: J4.1A R83.1 R86.1 R92.1 | length 16.6
  Top Layer w0.254: J4.1A@83.981,99.3 J4.1A@83.981,99.252 83.981,98.777 84.695,98.062 85.262,98.062 87.093,96.231 87.093,84.357 87.1,84.35
NetJ4_2A: J4.2A R85.1 R88.1 R90.1 | length 7.2
  Top Layer w0.254: R90.1@85.231,84.35 J4.2A@85.231,91.502
NetJ4_5A: J4.5A R84.1 R87.1 R89.1 | length 11.1
  Top Layer w0.254: J4.5A@72.731,91.502 72.731,86.969 75.35,84.35 R89.1@78.2,84.35
NetJ6_1A: J6.1A R16.2 U6.6 | length 28.2
  Bottom Layer w0.305: R16.2@68.554,-5.338 68.554,-4.639 69.634,-3.56 75.209,-3.56 75.874,-4.225 U6.6@75.874,-5.635 75.874,-11.48 69.073,-18.281 69.073,-20.398 J6.1A@68.749,-20.722
NetJ6_1B: J6.1B R17.2 U7.6 | length 31.2